# Altium PCB UTM53.pcbdoc
Units mm, origin at the board's own origin, x right, y up, seen from the top; angles counter-clockwise.
Board outline 127.21 x 100.63 mm, 2 copper layers (Top Layer, Bottom Layer), stack 0.07 mm thick; 39 components, 12 nets, 56 pads, 0 vias.
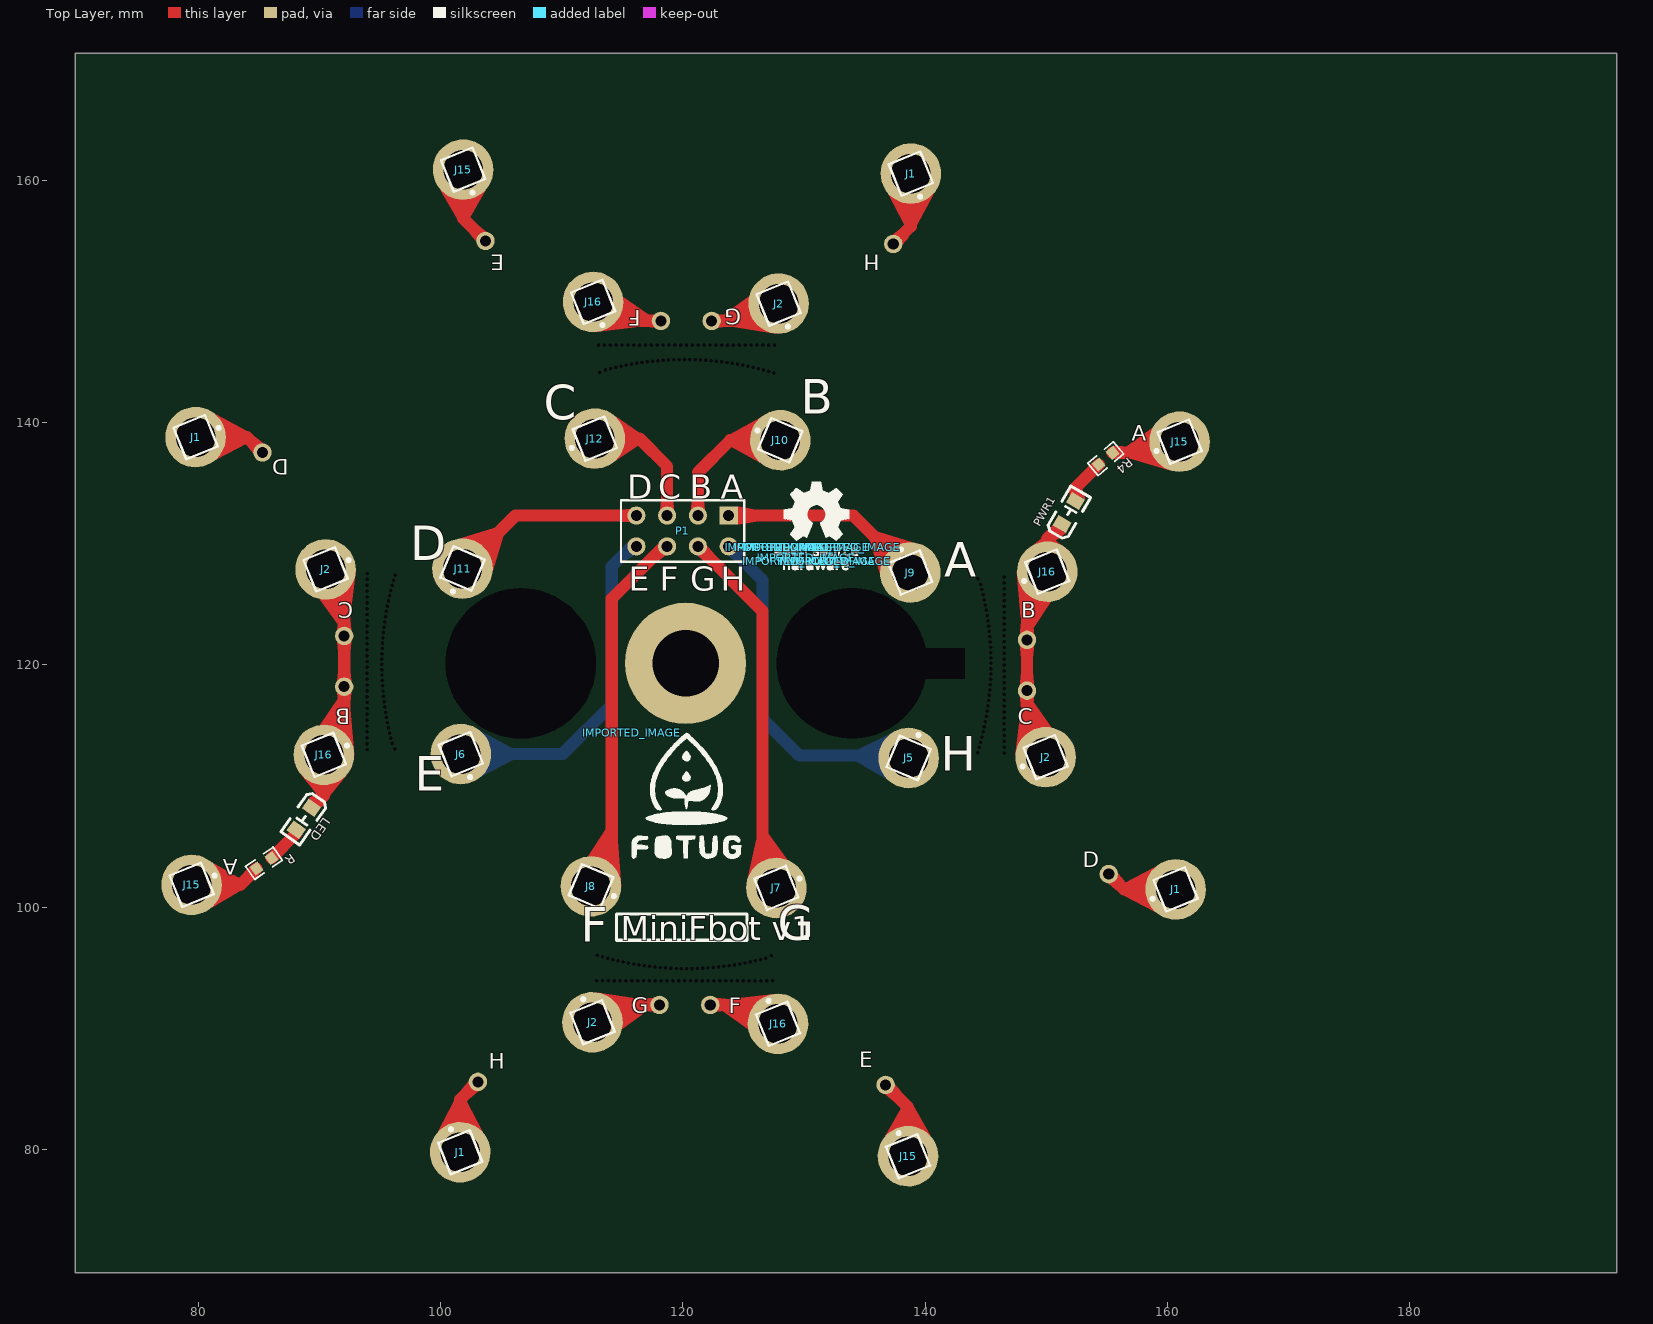
[diagram p0: Top Layer view]
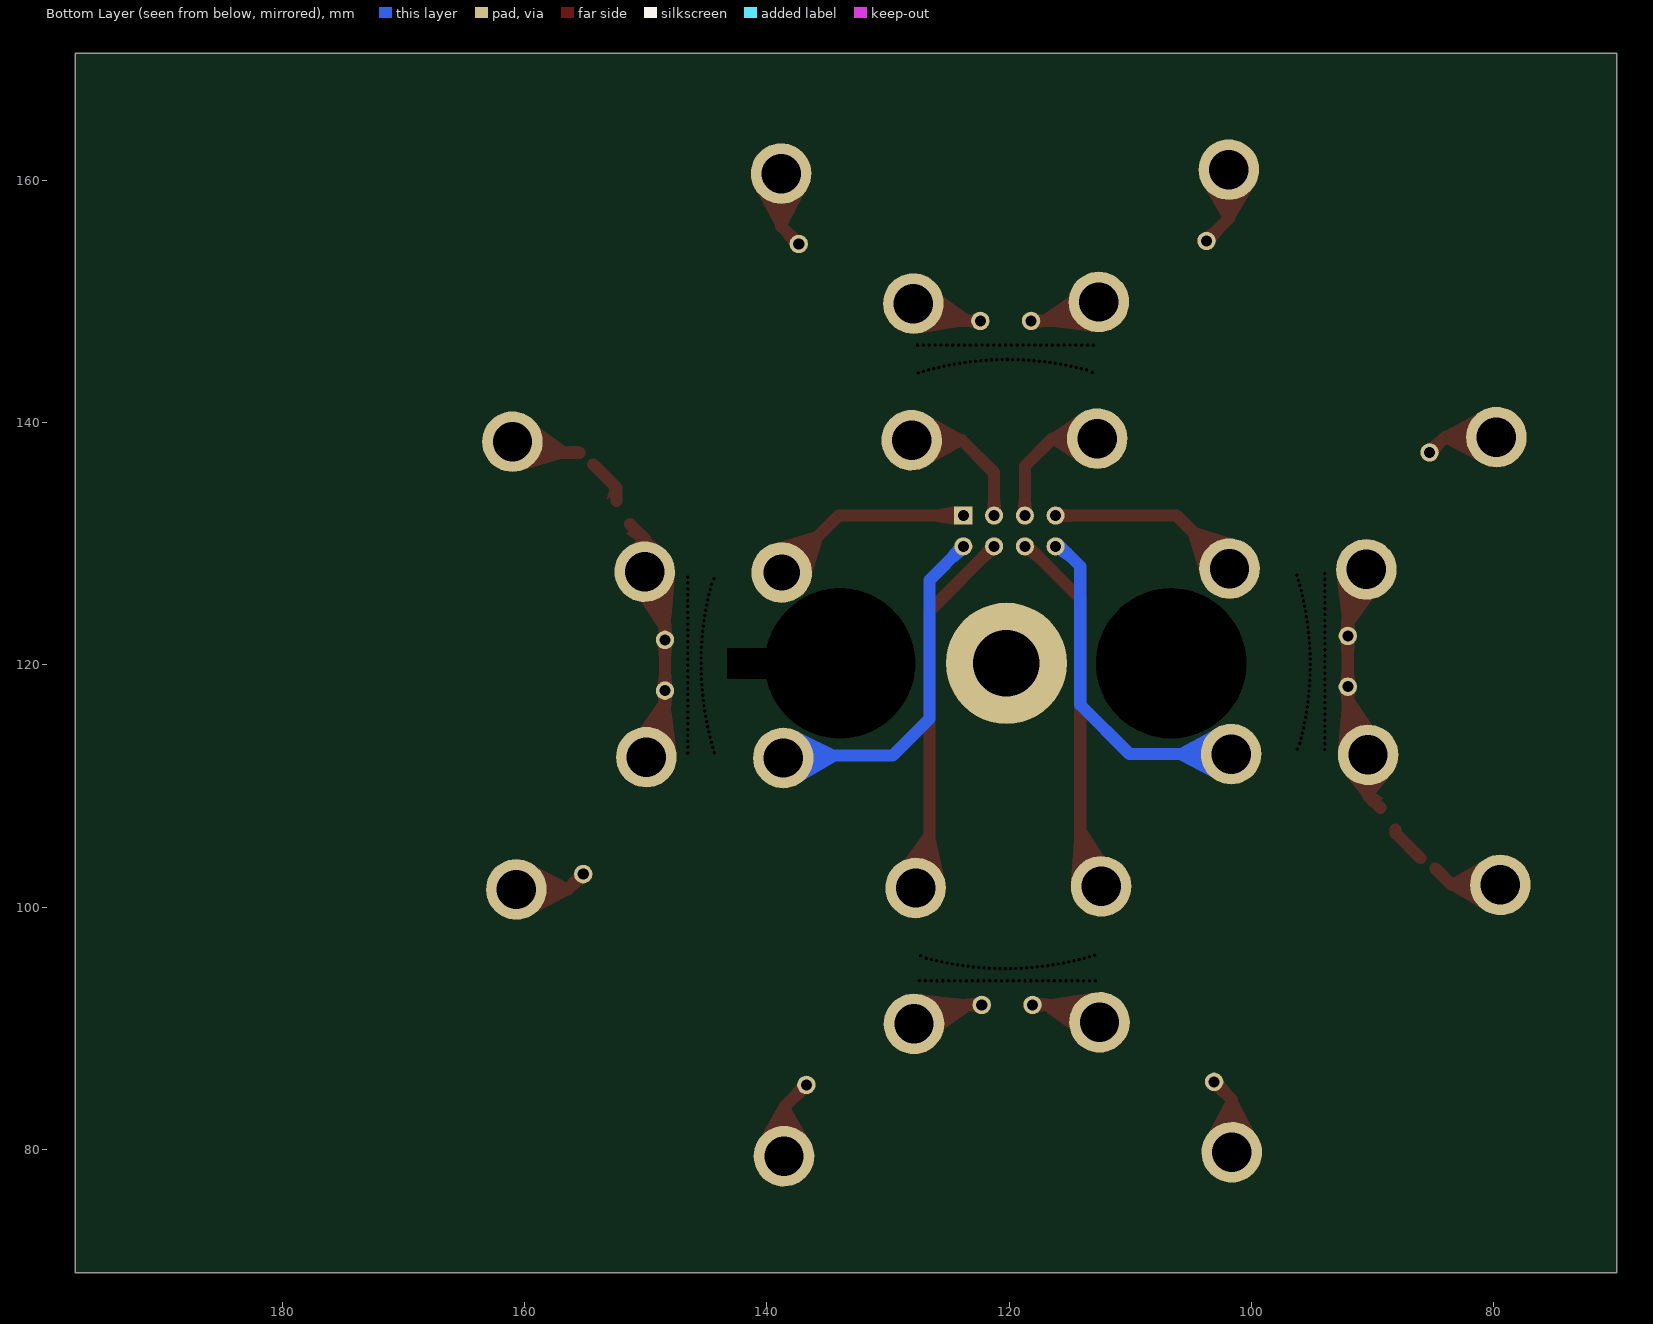
[diagram p1: Bottom Layer view, seen from below]

## Layer stack, top to bottom
Top Layer: signal copper 0.035
Bottom Layer: signal copper 0.035

## Board outline
197.064,69.85 69.85,69.85 69.85,170.478 197.064,170.478
cut-out: 112.82,120.133 ccw(c106.62,120.133) 100.42,120.133 ccw(c106.62,120.133)
cut-out: 146.636,127.245 ccw(c146.509,127.245) 146.382,127.245 ccw(c146.509,127.245)
cut-out: 146.636,126.761 ccw(c146.509,126.761) 146.382,126.761 ccw(c146.509,126.761)
cut-out: 146.636,126.277 ccw(c146.509,126.277) 146.382,126.277 ccw(c146.509,126.277)
cut-out: 146.636,125.793 ccw(c146.509,125.793) 146.382,125.793 ccw(c146.509,125.793)
cut-out: 146.636,124.341 ccw(c146.509,124.341) 146.382,124.341 ccw(c146.509,124.341)
cut-out: 146.636,124.825 ccw(c146.509,124.825) 146.382,124.825 ccw(c146.509,124.825)
cut-out: 146.636,125.309 ccw(c146.509,125.309) 146.382,125.309 ccw(c146.509,125.309)
cut-out: 146.636,123.857 ccw(c146.509,123.857) 146.382,123.857 ccw(c146.509,123.857)
cut-out: 146.636,122.405 ccw(c146.509,122.405) 146.382,122.405 ccw(c146.509,122.405)
cut-out: 146.636,123.373 ccw(c146.509,123.373) 146.382,123.373 ccw(c146.509,123.373)
cut-out: 146.636,122.889 ccw(c146.509,122.889) 146.382,122.889 ccw(c146.509,122.889)
cut-out: 146.636,120.953 ccw(c146.509,120.953) 146.382,120.953 ccw(c146.509,120.953)
cut-out: 146.636,121.437 ccw(c146.509,121.437) 146.382,121.437 ccw(c146.509,121.437)
cut-out: 146.636,121.921 ccw(c146.509,121.921) 146.382,121.921 ccw(c146.509,121.921)
cut-out: 146.636,120.469 ccw(c146.509,120.469) 146.382,120.469 ccw(c146.509,120.469)
cut-out: 146.636,119.017 ccw(c146.509,119.017) 146.382,119.017 ccw(c146.509,119.017)
cut-out: 146.636,119.985 ccw(c146.509,119.985) 146.382,119.985 ccw(c146.509,119.985)
cut-out: 146.636,119.501 ccw(c146.509,119.501) 146.382,119.501 ccw(c146.509,119.501)
cut-out: 146.636,117.565 ccw(c146.509,117.565) 146.382,117.565 ccw(c146.509,117.565)
cut-out: 146.636,118.049 ccw(c146.509,118.049) 146.382,118.049 ccw(c146.509,118.049)
cut-out: 146.636,118.533 ccw(c146.509,118.533) 146.382,118.533 ccw(c146.509,118.533)
cut-out: 146.636,117.081 ccw(c146.509,117.081) 146.382,117.081 ccw(c146.509,117.081)
cut-out: 146.636,115.629 ccw(c146.509,115.629) 146.382,115.629 ccw(c146.509,115.629)
cut-out: 146.636,116.597 ccw(c146.509,116.597) 146.382,116.597 ccw(c146.509,116.597)
cut-out: 146.636,116.113 ccw(c146.509,116.113) 146.382,116.113 ccw(c146.509,116.113)
cut-out: 146.636,114.177 ccw(c146.509,114.177) 146.382,114.177 ccw(c146.509,114.177)
cut-out: 146.636,114.661 ccw(c146.509,114.661) 146.382,114.661 ccw(c146.509,114.661)
cut-out: 146.636,115.145 ccw(c146.509,115.145) 146.382,115.145 ccw(c146.509,115.145)
cut-out: 146.636,113.693 ccw(c146.509,113.693) 146.382,113.693 ccw(c146.509,113.693)
cut-out: 146.636,112.725 ccw(c146.509,112.725) 146.382,112.725 ccw(c146.509,112.725)
cut-out: 146.636,113.209 ccw(c146.509,113.209) 146.382,113.209 ccw(c146.509,113.209)
cut-out: 144.477,127.118 ccw(c144.35,127.118) 144.223,127.118 ccw(c144.35,127.118)
cut-out: 144.446,112.766 ccw(c144.319,112.766) 144.192,112.766 ccw(c144.319,112.766)
cut-out: 144.571,113.187 ccw(c144.444,113.187) 144.317,113.187 ccw(c144.444,113.187)
cut-out: 144.688,113.611 ccw(c144.561,113.611) 144.434,113.611 ccw(c144.561,113.611)
cut-out: 144.798,114.037 ccw(c144.671,114.037) 144.544,114.037 ccw(c144.671,114.037)
cut-out: 144.901,114.465 ccw(c144.774,114.465) 144.647,114.465 ccw(c144.774,114.465)
cut-out: 144.996,114.894 ccw(c144.869,114.894) 144.742,114.894 ccw(c144.869,114.894)
cut-out: 145.084,115.325 ccw(c144.957,115.325) 144.83,115.325 ccw(c144.957,115.325)
cut-out: 145.164,115.757 ccw(c145.037,115.757) 144.91,115.757 ccw(c145.037,115.757)
cut-out: 145.237,116.191 ccw(c145.11,116.191) 144.983,116.191 ccw(c145.11,116.191)
cut-out: 145.302,116.626 ccw(c145.175,116.626) 145.048,116.626 ccw(c145.175,116.626)
cut-out: 145.451,117.937 ccw(c145.324,117.937) 145.197,117.937 ccw(c145.324,117.937)
cut-out: 145.359,117.062 ccw(c145.232,117.062) 145.105,117.062 ccw(c145.232,117.062)
cut-out: 145.409,117.499 ccw(c145.282,117.499) 145.155,117.499 ccw(c145.282,117.499)
cut-out: 145.486,118.376 ccw(c145.359,118.376) 145.232,118.376 ccw(c145.359,118.376)
cut-out: 145.543,120.573 ccw(c145.416,120.573) 145.289,120.573 ccw(c145.416,120.573)
cut-out: 145.532,121.013 ccw(c145.405,121.013) 145.278,121.013 ccw(c145.405,121.013)
cut-out: 145.512,118.815 ccw(c145.385,118.815) 145.258,118.815 ccw(c145.385,118.815)
cut-out: 145.532,119.254 ccw(c145.405,119.254) 145.278,119.254 ccw(c145.405,119.254)
cut-out: 145.543,119.694 ccw(c145.416,119.694) 145.289,119.694 ccw(c145.416,119.694)
cut-out: 145.547,120.133 ccw(c145.42,120.133) 145.293,120.133 ccw(c145.42,120.133)
cut-out: 145.512,121.452 ccw(c145.385,121.452) 145.258,121.452 ccw(c145.385,121.452)
cut-out: 145.486,121.891 ccw(c145.359,121.891) 145.232,121.891 ccw(c145.359,121.891)
cut-out: 145.451,122.33 ccw(c145.324,122.33) 145.197,122.33 ccw(c145.324,122.33)
cut-out: 145.409,122.768 ccw(c145.282,122.768) 145.155,122.768 ccw(c145.282,122.768)
cut-out: 145.359,123.205 ccw(c145.232,123.205) 145.105,123.205 ccw(c145.232,123.205)
cut-out: 145.302,123.641 ccw(c145.175,123.641) 145.048,123.641 ccw(c145.175,123.641)
cut-out: 145.237,124.076 ccw(c145.11,124.076) 144.983,124.076 ccw(c145.11,124.076)
cut-out: 145.164,124.509 ccw(c145.037,124.509) 144.91,124.509 ccw(c145.037,124.509)
cut-out: 145.084,124.942 ccw(c144.957,124.942) 144.83,124.942 ccw(c144.957,124.942)
cut-out: 144.996,125.373 ccw(c144.869,125.373) 144.742,125.373 ccw(c144.869,125.373)
cut-out: 144.901,125.802 ccw(c144.774,125.802) 144.647,125.802 ccw(c144.774,125.802)
cut-out: 144.798,126.23 ccw(c144.671,126.23) 144.544,126.23 ccw(c144.671,126.23)
cut-out: 144.688,126.656 ccw(c144.561,126.656) 144.434,126.656 ccw(c144.561,126.656)
cut-out: 115.017,144.656 ccw(c114.89,144.656) 114.763,144.656 ccw(c114.89,144.656)
cut-out: 114.588,144.561 ccw(c114.461,144.561) 114.334,144.561 ccw(c114.461,144.561)
cut-out: 114.16,144.458 ccw(c114.033,144.458) 113.906,144.458 ccw(c114.033,144.458)
cut-out: 113.734,144.348 ccw(c113.607,144.348) 113.48,144.348 ccw(c113.607,144.348)
cut-out: 115.448,144.743 ccw(c115.321,144.743) 115.194,144.743 ccw(c115.321,144.743)
cut-out: 115.881,144.824 ccw(c115.754,144.824) 115.627,144.824 ccw(c115.754,144.824)
cut-out: 127.203,144.23 ccw(c127.076,144.23) 126.949,144.23 ccw(c127.076,144.23)
cut-out: 126.779,144.348 ccw(c126.652,144.348) 126.525,144.348 ccw(c126.652,144.348)
cut-out: 126.353,144.458 ccw(c126.226,144.458) 126.099,144.458 ccw(c126.226,144.458)
cut-out: 125.925,144.561 ccw(c125.798,144.561) 125.671,144.561 ccw(c125.798,144.561)
cut-out: 125.496,144.656 ccw(c125.369,144.656) 125.242,144.656 ccw(c125.369,144.656)
cut-out: 125.065,144.743 ccw(c124.938,144.743) 124.811,144.743 ccw(c124.938,144.743)
cut-out: 124.633,144.824 ccw(c124.506,144.824) 124.379,144.824 ccw(c124.506,144.824)
cut-out: 124.199,144.896 ccw(c124.072,144.896) 123.945,144.896 ccw(c124.072,144.896)
cut-out: 123.764,144.961 ccw(c123.637,144.961) 123.51,144.961 ccw(c123.637,144.961)
cut-out: 116.75,144.961 ccw(c116.623,144.961) 116.496,144.961 ccw(c116.623,144.961)
cut-out: 116.315,144.896 ccw(c116.188,144.896) 116.061,144.896 ccw(c116.188,144.896)
cut-out: 113.272,144.136 ccw(c113.145,144.136) 113.018,144.136 ccw(c113.145,144.136)
cut-out: 117.186,145.019 ccw(c117.059,145.019) 116.932,145.019 ccw(c117.059,145.019)
cut-out: 118.06,145.111 ccw(c117.933,145.111) 117.806,145.111 ccw(c117.933,145.111)
cut-out: 117.623,145.068 ccw(c117.496,145.068) 117.369,145.068 ccw(c117.496,145.068)
cut-out: 118.938,145.172 ccw(c118.811,145.172) 118.684,145.172 ccw(c118.811,145.172)
cut-out: 118.499,145.145 ccw(c118.372,145.145) 118.245,145.145 ccw(c118.372,145.145)
cut-out: 119.377,145.191 ccw(c119.25,145.191) 119.123,145.191 ccw(c119.25,145.191)
cut-out: 119.817,145.203 ccw(c119.69,145.203) 119.563,145.203 ccw(c119.69,145.203)
cut-out: 122.453,145.111 ccw(c122.326,145.111) 122.199,145.111 ccw(c122.326,145.111)
cut-out: 122.015,145.145 ccw(c121.888,145.145) 121.761,145.145 ccw(c121.888,145.145)
cut-out: 121.576,145.172 ccw(c121.449,145.172) 121.322,145.172 ccw(c121.449,145.172)
cut-out: 121.136,145.191 ccw(c121.009,145.191) 120.882,145.191 ccw(c121.009,145.191)
cut-out: 120.696,145.203 ccw(c120.569,145.203) 120.442,145.203 ccw(c120.569,145.203)
cut-out: 122.891,145.068 ccw(c122.764,145.068) 122.637,145.068 ccw(c122.764,145.068)
cut-out: 123.328,145.019 ccw(c123.201,145.019) 123.074,145.019 ccw(c123.201,145.019)
cut-out: 120.257,145.206 ccw(c120.13,145.206) 120.003,145.206 ccw(c120.13,145.206)
cut-out: 127.624,144.105 ccw(c127.497,144.105) 127.37,144.105 ccw(c127.497,144.105)
cut-out: 95.825,114.804 ccw(c95.698,114.804) 95.571,114.804 ccw(c95.698,114.804)
cut-out: 95.92,114.374 ccw(c95.793,114.374) 95.666,114.374 ccw(c95.793,114.374)
cut-out: 96.022,113.947 ccw(c95.895,113.947) 95.768,113.947 ccw(c95.895,113.947)
cut-out: 96.133,113.521 ccw(c96.006,113.521) 95.879,113.521 ccw(c96.006,113.521)
cut-out: 95.737,115.235 ccw(c95.61,115.235) 95.483,115.235 ccw(c95.61,115.235)
cut-out: 95.657,115.667 ccw(c95.53,115.667) 95.403,115.667 ccw(c95.53,115.667)
cut-out: 96.25,126.989 ccw(c96.123,126.989) 95.996,126.989 ccw(c96.123,126.989)
cut-out: 96.133,126.565 ccw(c96.006,126.565) 95.879,126.565 ccw(c96.006,126.565)
cut-out: 96.022,126.14 ccw(c95.895,126.14) 95.768,126.14 ccw(c95.895,126.14)
cut-out: 95.92,125.712 ccw(c95.793,125.712) 95.666,125.712 ccw(c95.793,125.712)
cut-out: 95.825,125.282 ccw(c95.698,125.282) 95.571,125.282 ccw(c95.698,125.282)
cut-out: 95.737,124.852 ccw(c95.61,124.852) 95.483,124.852 ccw(c95.61,124.852)
cut-out: 95.657,124.419 ccw(c95.53,124.419) 95.403,124.419 ccw(c95.53,124.419)
cut-out: 95.584,123.985 ccw(c95.457,123.985) 95.33,123.985 ccw(c95.457,123.985)
cut-out: 95.519,123.55 ccw(c95.392,123.55) 95.265,123.55 ccw(c95.392,123.55)
cut-out: 95.519,116.536 ccw(c95.392,116.536) 95.265,116.536 ccw(c95.392,116.536)
cut-out: 95.584,116.101 ccw(c95.457,116.101) 95.33,116.101 ccw(c95.457,116.101)
cut-out: 96.344,113.058 ccw(c96.217,113.058) 96.09,113.058 ccw(c96.217,113.058)
cut-out: 95.462,116.972 ccw(c95.335,116.972) 95.208,116.972 ccw(c95.335,116.972)
cut-out: 95.37,117.847 ccw(c95.243,117.847) 95.116,117.847 ccw(c95.243,117.847)
cut-out: 95.412,117.409 ccw(c95.285,117.409) 95.158,117.409 ccw(c95.285,117.409)
cut-out: 95.308,118.724 ccw(c95.181,118.724) 95.054,118.724 ccw(c95.181,118.724)
cut-out: 95.335,118.285 ccw(c95.208,118.285) 95.081,118.285 ccw(c95.208,118.285)
cut-out: 95.289,119.164 ccw(c95.162,119.164) 95.035,119.164 ccw(c95.162,119.164)
cut-out: 95.278,119.603 ccw(c95.151,119.603) 95.024,119.603 ccw(c95.151,119.603)
cut-out: 95.37,122.239 ccw(c95.243,122.239) 95.116,122.239 ccw(c95.243,122.239)
cut-out: 95.335,121.801 ccw(c95.208,121.801) 95.081,121.801 ccw(c95.208,121.801)
cut-out: 95.308,121.362 ccw(c95.181,121.362) 95.054,121.362 ccw(c95.181,121.362)
cut-out: 95.289,120.923 ccw(c95.162,120.923) 95.035,120.923 ccw(c95.162,120.923)
cut-out: 95.278,120.483 ccw(c95.151,120.483) 95.024,120.483 ccw(c95.151,120.483)
cut-out: 95.412,122.677 ccw(c95.285,122.677) 95.158,122.677 ccw(c95.285,122.677)
cut-out: 95.462,123.114 ccw(c95.335,123.114) 95.208,123.114 ccw(c95.335,123.114)
cut-out: 95.274,120.043 ccw(c95.147,120.043) 95.02,120.043 ccw(c95.147,120.043)
cut-out: 96.375,127.411 ccw(c96.248,127.411) 96.121,127.411 ccw(c96.248,127.411)
cut-out: 125.677,95.484 ccw(c125.55,95.484) 125.423,95.484 ccw(c125.55,95.484)
cut-out: 126.106,95.579 ccw(c125.979,95.579) 125.852,95.579 ccw(c125.979,95.579)
cut-out: 126.534,95.682 ccw(c126.407,95.682) 126.28,95.682 ccw(c126.407,95.682)
cut-out: 126.959,95.792 ccw(c126.832,95.792) 126.705,95.792 ccw(c126.832,95.792)
cut-out: 125.246,95.396 ccw(c125.119,95.396) 124.992,95.396 ccw(c125.119,95.396)
cut-out: 124.813,95.316 ccw(c124.686,95.316) 124.559,95.316 ccw(c124.686,95.316)
cut-out: 113.491,95.91 ccw(c113.364,95.91) 113.237,95.91 ccw(c113.364,95.91)
cut-out: 113.915,95.792 ccw(c113.788,95.792) 113.661,95.792 ccw(c113.788,95.792)
cut-out: 114.341,95.682 ccw(c114.214,95.682) 114.087,95.682 ccw(c114.214,95.682)
cut-out: 114.768,95.579 ccw(c114.641,95.579) 114.514,95.579 ccw(c114.641,95.579)
cut-out: 115.198,95.484 ccw(c115.071,95.484) 114.944,95.484 ccw(c115.071,95.484)
cut-out: 115.629,95.396 ccw(c115.502,95.396) 115.375,95.396 ccw(c115.502,95.396)
cut-out: 116.061,95.316 ccw(c115.934,95.316) 115.807,95.316 ccw(c115.934,95.316)
cut-out: 116.495,95.244 ccw(c116.368,95.244) 116.241,95.244 ccw(c116.368,95.244)
cut-out: 116.93,95.179 ccw(c116.803,95.179) 116.676,95.179 ccw(c116.803,95.179)
cut-out: 123.944,95.179 ccw(c123.817,95.179) 123.69,95.179 ccw(c123.817,95.179)
cut-out: 124.379,95.244 ccw(c124.252,95.244) 124.125,95.244 ccw(c124.252,95.244)
cut-out: 127.422,96.003 ccw(c127.295,96.003) 127.168,96.003 ccw(c127.295,96.003)
cut-out: 123.508,95.121 ccw(c123.381,95.121) 123.254,95.121 ccw(c123.381,95.121)
cut-out: 123.071,95.071 ccw(c122.944,95.071) 122.817,95.071 ccw(c122.944,95.071)
cut-out: 121.756,94.968 ccw(c121.629,94.968) 121.502,94.968 ccw(c121.629,94.968)
cut-out: 122.195,94.995 ccw(c122.068,94.995) 121.941,94.995 ccw(c122.068,94.995)
cut-out: 121.317,94.949 ccw(c121.19,94.949) 121.063,94.949 ccw(c121.19,94.949)
cut-out: 120.877,94.937 ccw(c120.75,94.937) 120.623,94.937 ccw(c120.75,94.937)
cut-out: 118.241,95.029 ccw(c118.114,95.029) 117.987,95.029 ccw(c118.114,95.029)
cut-out: 118.679,94.995 ccw(c118.552,94.995) 118.425,94.995 ccw(c118.552,94.995)
cut-out: 119.118,94.968 ccw(c118.991,94.968) 118.864,94.968 ccw(c118.991,94.968)
cut-out: 119.558,94.949 ccw(c119.431,94.949) 119.304,94.949 ccw(c119.431,94.949)
cut-out: 119.997,94.937 ccw(c119.87,94.937) 119.743,94.937 ccw(c119.87,94.937)
cut-out: 117.803,95.071 ccw(c117.676,95.071) 117.549,95.071 ccw(c117.676,95.071)
cut-out: 117.366,95.121 ccw(c117.239,95.121) 117.112,95.121 ccw(c117.239,95.121)
cut-out: 120.437,94.933 ccw(c120.31,94.933) 120.183,94.933 ccw(c120.31,94.933)
cut-out: 113.069,96.035 ccw(c112.942,96.035) 112.815,96.035 ccw(c112.942,96.035)
cut-out: 122.634,95.029 ccw(c122.507,95.029) 122.38,95.029 ccw(c122.507,95.029)
cut-out: 113.972,93.931 ccw(c113.845,93.931) 113.718,93.931 ccw(c113.845,93.931)
cut-out: 113.004,93.931 ccw(c112.877,93.931) 112.75,93.931 ccw(c112.877,93.931)
cut-out: 113.488,93.931 ccw(c113.361,93.931) 113.234,93.931 ccw(c113.361,93.931)
cut-out: 127.04,93.931 ccw(c126.913,93.931) 126.786,93.931 ccw(c126.913,93.931)
cut-out: 126.556,93.931 ccw(c126.429,93.931) 126.302,93.931 ccw(c126.429,93.931)
cut-out: 127.524,93.931 ccw(c127.397,93.931) 127.27,93.931 ccw(c127.397,93.931)
cut-out: 125.104,93.931 ccw(c124.977,93.931) 124.85,93.931 ccw(c124.977,93.931)
cut-out: 126.072,93.931 ccw(c125.945,93.931) 125.818,93.931 ccw(c125.945,93.931)
cut-out: 125.588,93.931 ccw(c125.461,93.931) 125.334,93.931 ccw(c125.461,93.931)
cut-out: 122.684,93.931 ccw(c122.557,93.931) 122.43,93.931 ccw(c122.557,93.931)
cut-out: 124.62,93.931 ccw(c124.493,93.931) 124.366,93.931 ccw(c124.493,93.931)
cut-out: 124.136,93.931 ccw(c124.009,93.931) 123.882,93.931 ccw(c124.009,93.931)
cut-out: 123.652,93.931 ccw(c123.525,93.931) 123.398,93.931 ccw(c123.525,93.931)
cut-out: 123.168,93.931 ccw(c123.041,93.931) 122.914,93.931 ccw(c123.041,93.931)
cut-out: 121.716,93.931 ccw(c121.589,93.931) 121.462,93.931 ccw(c121.589,93.931)
cut-out: 122.2,93.931 ccw(c122.073,93.931) 121.946,93.931 ccw(c122.073,93.931)
cut-out: 114.456,93.931 ccw(c114.329,93.931) 114.202,93.931 ccw(c114.329,93.931)
cut-out: 121.232,93.931 ccw(c121.105,93.931) 120.978,93.931 ccw(c121.105,93.931)
cut-out: 120.748,93.931 ccw(c120.621,93.931) 120.494,93.931 ccw(c120.621,93.931)
cut-out: 119.296,93.931 ccw(c119.169,93.931) 119.042,93.931 ccw(c119.169,93.931)
cut-out: 120.264,93.931 ccw(c120.137,93.931) 120.01,93.931 ccw(c120.137,93.931)
cut-out: 119.78,93.931 ccw(c119.653,93.931) 119.526,93.931 ccw(c119.653,93.931)
cut-out: 117.844,93.931 ccw(c117.717,93.931) 117.59,93.931 ccw(c117.717,93.931)
cut-out: 118.328,93.931 ccw(c118.201,93.931) 118.074,93.931 ccw(c118.201,93.931)
cut-out: 118.812,93.931 ccw(c118.685,93.931) 118.558,93.931 ccw(c118.685,93.931)
cut-out: 117.36,93.931 ccw(c117.233,93.931) 117.106,93.931 ccw(c117.233,93.931)
cut-out: 116.876,93.931 ccw(c116.749,93.931) 116.622,93.931 ccw(c116.749,93.931)
cut-out: 116.392,93.931 ccw(c116.265,93.931) 116.138,93.931 ccw(c116.265,93.931)
cut-out: 115.908,93.931 ccw(c115.781,93.931) 115.654,93.931 ccw(c115.781,93.931)
cut-out: 114.94,93.931 ccw(c114.813,93.931) 114.686,93.931 ccw(c114.813,93.931)
cut-out: 115.424,93.931 ccw(c115.297,93.931) 115.17,93.931 ccw(c115.297,93.931)
cut-out: 113.647,146.397 ccw(c113.52,146.397) 113.393,146.397 ccw(c113.52,146.397)
cut-out: 114.131,146.397 ccw(c114.004,146.397) 113.877,146.397 ccw(c114.004,146.397)
cut-out: 113.163,146.397 ccw(c113.036,146.397) 112.909,146.397 ccw(c113.036,146.397)
cut-out: 115.583,146.397 ccw(c115.456,146.397) 115.329,146.397 ccw(c115.456,146.397)
cut-out: 114.615,146.397 ccw(c114.488,146.397) 114.361,146.397 ccw(c114.488,146.397)
cut-out: 115.099,146.397 ccw(c114.972,146.397) 114.845,146.397 ccw(c114.972,146.397)
cut-out: 118.004,146.397 ccw(c117.877,146.397) 117.75,146.397 ccw(c117.877,146.397)
cut-out: 116.068,146.397 ccw(c115.941,146.397) 115.814,146.397 ccw(c115.941,146.397)
cut-out: 116.552,146.397 ccw(c116.425,146.397) 116.298,146.397 ccw(c116.425,146.397)
cut-out: 117.036,146.397 ccw(c116.909,146.397) 116.782,146.397 ccw(c116.909,146.397)
cut-out: 117.52,146.397 ccw(c117.393,146.397) 117.266,146.397 ccw(c117.393,146.397)
cut-out: 118.972,146.397 ccw(c118.845,146.397) 118.718,146.397 ccw(c118.845,146.397)
cut-out: 118.488,146.397 ccw(c118.361,146.397) 118.234,146.397 ccw(c118.361,146.397)
cut-out: 119.456,146.397 ccw(c119.329,146.397) 119.202,146.397 ccw(c119.329,146.397)
cut-out: 119.94,146.397 ccw(c119.813,146.397) 119.686,146.397 ccw(c119.813,146.397)
cut-out: 121.392,146.397 ccw(c121.265,146.397) 121.138,146.397 ccw(c121.265,146.397)
cut-out: 120.424,146.397 ccw(c120.297,146.397) 120.17,146.397 ccw(c120.297,146.397)
cut-out: 120.908,146.397 ccw(c120.781,146.397) 120.654,146.397 ccw(c120.781,146.397)
cut-out: 126.716,146.397 ccw(c126.589,146.397) 126.462,146.397 ccw(c126.589,146.397)
cut-out: 126.232,146.397 ccw(c126.105,146.397) 125.978,146.397 ccw(c126.105,146.397)
cut-out: 122.844,146.397 ccw(c122.717,146.397) 122.59,146.397 ccw(c122.717,146.397)
cut-out: 122.36,146.397 ccw(c122.233,146.397) 122.106,146.397 ccw(c122.233,146.397)
cut-out: 121.876,146.397 ccw(c121.749,146.397) 121.622,146.397 ccw(c121.749,146.397)
cut-out: 123.328,146.397 ccw(c123.201,146.397) 123.074,146.397 ccw(c123.201,146.397)
cut-out: 123.812,146.397 ccw(c123.685,146.397) 123.558,146.397 ccw(c123.685,146.397)
cut-out: 124.296,146.397 ccw(c124.169,146.397) 124.042,146.397 ccw(c124.169,146.397)
cut-out: 124.78,146.397 ccw(c124.653,146.397) 124.526,146.397 ccw(c124.653,146.397)
cut-out: 125.748,146.397 ccw(c125.621,146.397) 125.494,146.397 ccw(c125.621,146.397)
cut-out: 125.264,146.397 ccw(c125.137,146.397) 125.01,146.397 ccw(c125.137,146.397)
cut-out: 127.684,146.397 ccw(c127.557,146.397) 127.43,146.397 ccw(c127.557,146.397)
cut-out: 127.2,146.397 ccw(c127.073,146.397) 126.946,146.397 ccw(c127.073,146.397)
cut-out: 94.058,126.574 ccw(c93.931,126.574) 93.804,126.574 ccw(c93.931,126.574)
cut-out: 94.058,127.542 ccw(c93.931,127.542) 93.804,127.542 ccw(c93.931,127.542)
cut-out: 94.058,127.058 ccw(c93.931,127.058) 93.804,127.058 ccw(c93.931,127.058)
cut-out: 94.058,113.505 ccw(c93.931,113.505) 93.804,113.505 ccw(c93.931,113.505)
cut-out: 94.058,113.989 ccw(c93.931,113.989) 93.804,113.989 ccw(c93.931,113.989)
cut-out: 94.058,119.314 ccw(c93.931,119.314) 93.804,119.314 ccw(c93.931,119.314)
cut-out: 94.058,119.798 ccw(c93.931,119.798) 93.804,119.798 ccw(c93.931,119.798)
cut-out: 94.058,121.25 ccw(c93.931,121.25) 93.804,121.25 ccw(c93.931,121.25)
cut-out: 94.058,120.282 ccw(c93.931,120.282) 93.804,120.282 ccw(c93.931,120.282)
cut-out: 94.058,120.766 ccw(c93.931,120.766) 93.804,120.766 ccw(c93.931,120.766)
cut-out: 94.058,122.702 ccw(c93.931,122.702) 93.804,122.702 ccw(c93.931,122.702)
cut-out: 94.058,122.218 ccw(c93.931,122.218) 93.804,122.218 ccw(c93.931,122.218)
cut-out: 94.058,121.734 ccw(c93.931,121.734) 93.804,121.734 ccw(c93.931,121.734)
cut-out: 94.058,123.186 ccw(c93.931,123.186) 93.804,123.186 ccw(c93.931,123.186)
cut-out: 94.058,123.67 ccw(c93.931,123.67) 93.804,123.67 ccw(c93.931,123.67)
cut-out: 94.058,124.154 ccw(c93.931,124.154) 93.804,124.154 ccw(c93.931,124.154)
cut-out: 94.058,124.638 ccw(c93.931,124.638) 93.804,124.638 ccw(c93.931,124.638)
cut-out: 94.058,125.606 ccw(c93.931,125.606) 93.804,125.606 ccw(c93.931,125.606)
cut-out: 94.058,125.122 ccw(c93.931,125.122) 93.804,125.122 ccw(c93.931,125.122)
cut-out: 94.058,113.021 ccw(c93.931,113.021) 93.804,113.021 ccw(c93.931,113.021)
cut-out: 94.058,115.441 ccw(c93.931,115.441) 93.804,115.441 ccw(c93.931,115.441)
cut-out: 94.058,114.473 ccw(c93.931,114.473) 93.804,114.473 ccw(c93.931,114.473)
cut-out: 94.058,114.957 ccw(c93.931,114.957) 93.804,114.957 ccw(c93.931,114.957)
cut-out: 94.058,117.862 ccw(c93.931,117.862) 93.804,117.862 ccw(c93.931,117.862)
cut-out: 94.058,115.925 ccw(c93.931,115.925) 93.804,115.925 ccw(c93.931,115.925)
cut-out: 94.058,116.409 ccw(c93.931,116.409) 93.804,116.409 ccw(c93.931,116.409)
cut-out: 94.058,116.893 ccw(c93.931,116.893) 93.804,116.893 ccw(c93.931,116.893)
cut-out: 94.058,117.377 ccw(c93.931,117.377) 93.804,117.377 ccw(c93.931,117.377)
cut-out: 94.058,118.83 ccw(c93.931,118.83) 93.804,118.83 ccw(c93.931,118.83)
cut-out: 94.058,118.346 ccw(c93.931,118.346) 93.804,118.346 ccw(c93.931,118.346)
cut-out: 94.058,126.09 ccw(c93.931,126.09) 93.804,126.09 ccw(c93.931,126.09)
cut-out: 140.015,118.863 cw(c133.947,120.133) 133.947,113.933 cw(c133.947,120.133) 127.747,120.133 cw(c133.947,120.133) 133.947,126.333 cw(c133.947,120.133) 140.024,121.363 143.278,121.363 143.278,118.863

## Components (designator, comment, footprint, x,y, rotation, side; value= is the part's Value field where it differs from the comment)
IMPORTED_IMAGE "IMPORTED_IMAGE" IMPORTED_IMAGE 115.768,114.418 r0 top
IMPORTED_IMAGE "IMPORTED_IMAGE" IMPORTED_IMAGE 128.262,129.709 r0 top
IMPORTED_IMAGE "IMPORTED_IMAGE" IMPORTED_IMAGE 128.941,129.709 r0 top
IMPORTED_IMAGE "IMPORTED_IMAGE" IMPORTED_IMAGE 127.542,129.709 r0 top
IMPORTED_IMAGE "IMPORTED_IMAGE" IMPORTED_IMAGE 130.18,128.846 r0 top
IMPORTED_IMAGE "IMPORTED_IMAGE" IMPORTED_IMAGE 131.338,129.709 r0 top
IMPORTED_IMAGE "IMPORTED_IMAGE" IMPORTED_IMAGE 131.874,128.563 r0 top
IMPORTED_IMAGE "IMPORTED_IMAGE" IMPORTED_IMAGE 133.895,129.709 r0 top
IMPORTED_IMAGE "IMPORTED_IMAGE" IMPORTED_IMAGE 133.11,128.563 r0 top
IMPORTED_IMAGE "IMPORTED_IMAGE" IMPORTED_IMAGE 128.975,128.569 r0 top
J1 "Socket" PIN1#1 160.663,101.469 r112 top
J1 "Socket" PIN1#1 138.813,160.551 r202 top
J1 "Socket" PIN1#1 101.621,79.777 r22 top
J1 "Socket" PIN1#1 79.777,138.797 r292 top
J2 "Socket" PIN1#1 149.934,112.387 r112 top
J2 "Socket" PIN1#1 127.895,149.822 r202 top
J2 "Socket" PIN1#1 112.539,90.506 r22 top
J2 "Socket" PIN1#1 90.506,127.88 r292 top
J5 "Socket" PIN1#1 138.63,112.319 r337 top
J6 "Socket" PIN1#1 101.676,112.641 r202 top
J7 "Socket" PIN1#1 127.712,101.59 r292 top
J8 "Socket" PIN1#1 112.405,101.723 r247 top
J9 "Socket" PIN1#2 138.764,127.626 r22 top
J10 "Socket" PIN1#1 128.035,138.543 r67 top
J11 "Socket" PIN1#1 101.81,127.948 r157 top
J12 "Socket" PIN1#1 112.728,138.677 r112 top
J15 "Socket" PIN1#1 160.985,138.423 r112 top
J15 "Socket" PIN1#1 101.859,160.873 r202 top
J15 "Socket" PIN1#1 138.575,79.454 r22 top
J15 "Socket" PIN1#1 79.454,101.844 r292 top
J16 "Socket" PIN1#1 150.067,127.694 r112 top
J16 "Socket" PIN1#1 112.588,149.955 r202 top
J16 "Socket" PIN1#1 127.846,90.372 r22 top
J16 "Socket" PIN1#1 90.372,112.573 r292 top
LED "LED_BLUE" LED0805-RD 88.724,107.306 r235 top
P1 "Header 4X2" HDR2X4 123.776,132.325 r180 top
PWR1 "LED_BLUE" LED0805-RD 151.843,132.579 r60 top
R "0603WAF1001T5E" R0603 85.422,103.623 r35 top
R4 "0603WAF1001T5E" R0603 154.891,137.024 r220 top

## Footprints (in the part's own frame and the unit in brackets; to place one, negate y for a bottom-side part, rotate by r counter-clockwise, add the part's x,y. Pads: shape width x height; smd on the part's side, far side on the other; paste and mask are expansions set on the pad)
HDR2X4 [mm]
  rect 1.5x1.5 hole 0.9: 1(0,0)
  round 1.5 hole 0.9: 2(0,2.54) 3(2.54,0) 4(2.54,2.54) 5(5.08,0) 6(5.08,2.54) 7(7.62,0) 8(7.62,2.54)
  round 0.013 hole 0.005: 8(7.62,2.54)
  silkscreen extent -1.27,-1.27 8.89,3.81
IMPORTED_IMAGE [mm]
  silkscreen extent 0,-10.41 9.02,0
LED0805-RD [mm]
  rect 1x1.25 smd: 1(-1.1,0) 2(1.1,0)
  silkscreen extent -2.1,-0.95 1.98,0.96
PIN1#1 [mm]
  round 5 hole 3.25: 1(0,0)
  silkscreen extent -1.4,-1.4 1.4,2.17
PIN1#2 [mm]
  round 5 hole 3: 1(0,0)
  silkscreen extent -1.4,-1.4 1.4,2.17
R0603 [mm]
  rect 0.806x0.864 smd: 1(-0.753,0) 2(0.753,0)
  silkscreen extent -1.39,-0.66 1.39,0.66

## Free pads (board coordinates)
  round 1.524 hole 0.914: 2(103.075,85.589) 3(137.359,154.738) 3(155.145,102.734) 4(85.295,137.532) 6(118.061,91.939) 7(122.252,91.939) 7(122.373,148.388) 7(148.396,117.874) 8(92.044,122.393) 8(118.182,148.388) 8(136.73,85.335) 8(148.396,122.065) 9(92.044,118.202) 9(103.704,154.992)
  round 10 hole 5.5: 6(120.22,120.133)

## Nets (pads, with @x,y where several pads share a name; then routed paths per layer and width w, separated by ;. In a path a pad name is that pad's centre, name@x,y a point inside that pad or via, vN(x,y) a via of type N, cw(c..) or ccw(c..) an arc to the next point about the centre after c; other vN are vias at no path point)
$1N1556: J15.1@160.985,138.423 R4.1 | length 5.9
  Top Layer w1: R4.1 160.071,137.509 J15.1@160.985,138.423
$1N1649: PWR1.2 R4.2 | length 3.8
  Top Layer w1: PWR1.2 152.393,134.619 R4.2
$1N1755: LED.2 R.2 | length 3.2
  Top Layer w1: R.2 88.093,106.11 LED.2
A: J9.1 P1.1 | length 16.6
  Top Layer w1: P1.1 134.064,132.325 J9.1@138.548,127.841
B: J10.1 P1.3 | length 11.5
  Top Layer w1: P1.3 121.236,135.881 123.898,138.543 J10.1
C: J12.1 P1.5 | length 11
  Top Layer w1: J12.1 116.408,138.677 118.696,136.389 P1.5
D: J11.1 P1.7 | length 16.2
  Top Layer w1: J11.1 106.187,132.325 P1.7
E: J6.1 P1.8 | length 28.3
  Bottom Layer w1: J6.1 110.06,112.64 114.124,116.704 114.124,128.134 115.775,129.785 P1.8@116.156,129.785
F: J8.1 P1.6 | length 30.8
  Top Layer w1: J8.1 114.124,103.442 114.124,125.467 118.442,129.785 P1.6
G: J7.1 P1.4 | length 30.9
  Top Layer w1: P1.4 126.57,124.451 126.57,103.75 127.712,102.608 J7.1
H: J5.1 P1.2 | length 28.8
  Bottom Layer w1: P1.2 126.57,126.991 126.57,115.561 129.618,112.513 138.435,112.513 J5.1
"": J1.1 J2.1 J15.1@79.454,101.844 J15.1@101.859,160.873 J15.1@138.575,79.454 J16.1 LED.1 pad.2 pad.3 pad.4 pad.6 pad.7 pad.8 pad.9 PWR1.1 R.1 | length 111.3
  Top Layer w1: J15.1@79.454,101.844 83.457,101.844 R.1 ; J1.1@79.777,138.797 84.03,138.797 pad.4 ; LED.1 90.372,109.225 90.372,112.573 92.044,114.244 92.044,118.202 92.044,122.393 92.044,126.342 J2.1@90.506,127.88 ; J1.1@101.621,79.777 101.621,84.136 pad.2 ; J15.1@101.859,160.873 101.859,156.837 pad.9@103.704,154.992 ; J2.1@112.539,90.506 113.972,91.939 pad.6@118.061,91.939 ; J16.1@112.588,149.955 114.155,148.388 pad.8@118.182,148.388 ; pad.7@122.252,91.939 126.279,91.939 J16.1@127.846,90.372 ; pad.7@122.373,148.388 126.461,148.388 J2.1@127.895,149.822 ; pad.8@136.73,85.335 138.575,83.491 J15.1@138.575,79.454 ; pad.3@137.359,154.738 138.813,156.192 J1.1@138.813,160.551 ; J2.1@149.934,112.387 148.396,113.925 148.396,117.874 148.396,122.065 148.396,126.023 150.067,127.694 150.067,130.401 PWR1.1 ; pad.3@155.145,102.734 156.41,101.469 J1.1@160.663,101.469

## Other copper
Top Layer:
  region net G: 128.625,103.917 127.07,106.038 126.07,105.524 125.289,102.204
  region net F: 114.904,101.635 114.624,105.475 113.624,106.422 112.18,104.213
  region net A: 138.92,130.121 136.112,130.984 135.405,130.277 136.269,127.469
  region net B: 126.381,140.418 123.898,139.043 123.898,138.043 126.381,136.668
  region net D: 104.305,127.791 105.169,130.6 104.462,131.307 101.653,130.443
  region net C: 114.381,136.802 116.408,138.177 116.408,139.177 114.381,140.552
  region net A: 126.026,132.825 124.526,133.075 124.526,131.575 126.026,131.825
  region net B: 121.798,132.821 121.736,133.6 120.736,133.6 120.673,132.821
  region net G: 121.189,129.037 121.784,128.53 122.491,129.237 121.984,129.832
  region net C: 119.258,132.821 119.196,133.6 118.196,133.6 118.133,132.821
  region net F: 117.98,130.01 117.405,129.456 117.938,128.574 118.562,129.047
  region net D: 115.66,132.888 114.881,132.825 114.881,131.825 115.66,131.763
  region net "": 159.009,103.344 156.413,101.969 156.413,100.969 159.009,99.594
  region net "": 150.395,114.844 148.896,116.968 147.896,116.188 147.438,112.538
  region net $1N1556: 158.761,139.563 156.582,138.009 156.975,137.009 160.132,136.073
  region net "": 147.568,127.718 147.896,123.931 148.896,123.032 150.357,125.211
  region net "": 151.942,129.348 150.567,130.401 149.567,130.401 148.192,129.348
  region net "": 122.756,91.368 123.547,91.439 123.547,92.439 122.756,92.511
  region net "": 117.557,92.511 116.766,92.439 116.766,91.439 117.557,91.368
  region net "": 136.682,84.575 137.292,84.066 137.999,84.773 137.49,85.383
  region net "": 102.314,85.637 101.805,85.027 102.513,84.32 103.123,84.829
  region net "": 122.877,147.817 123.668,147.888 123.668,148.888 122.877,148.96
  region net "": 103.751,155.753 103.141,156.262 102.434,155.555 102.943,154.945
  region net "": 117.678,148.96 116.886,148.888 116.886,147.888 117.678,147.817
  region net "": 138.119,154.691 138.628,155.301 137.921,156.008 137.311,155.499
  region net "": 147.825,121.561 147.896,120.77 148.896,120.77 148.968,121.561
  region net "": 148.968,122.569 148.896,123.36 147.896,123.36 147.825,122.569
  region net "": 148.968,118.378 148.896,119.169 147.896,119.169 147.825,118.378
  region net "": 147.825,117.37 147.896,116.579 148.896,116.579 148.968,117.37
  region net "": 155.097,101.974 155.707,101.465 156.414,102.172 155.905,102.782
  region net "": 112.701,147.458 116.38,147.888 117.184,148.888 115.052,150.38
  region net "": 127.733,92.87 124.054,92.439 123.25,91.439 125.382,89.948
  region net "": 125.465,150.41 123.36,148.888 124.06,147.888 127.615,147.337
  region net "": 114.969,89.918 117.073,91.439 116.373,92.439 112.819,92.99
  region net "": 136.938,158.897 138.313,156.301 139.313,156.301 140.688,158.897
  region net "": 103.496,81.431 102.121,84.027 101.121,84.027 99.746,81.431
  region net "": 99.984,159.22 101.359,156.837 102.359,156.837 103.734,159.22
  region net "": 140.45,81.108 139.075,83.491 138.075,83.491 136.7,81.108
  region net $1N1649: 152.893,134.619 151.893,134.619 152.102,134.278 153.184,133.653
  region net "": 150.421,130.048 151.584,130.881 150.502,131.506 149.714,130.755
  region net $1N1556: 157.044,137.009 157.075,138.009 155.499,138.099 156.055,137.437
  region net "": 90.045,125.422 91.544,123.299 92.544,124.079 93.001,127.729
  region net "": 81.431,136.922 84.027,138.297 84.027,139.297 81.431,140.672
  region net "": 88.497,110.919 89.872,109.225 90.872,109.225 92.247,110.919
  region net "": 92.872,112.549 92.544,116.336 91.544,117.234 90.083,115.056
  region net "": 92.615,118.706 92.544,119.497 91.544,119.497 91.472,118.706
  region net "": 91.472,117.698 91.544,116.906 92.544,116.906 92.615,117.698
  region net "": 92.615,122.897 92.544,123.688 91.544,123.688 91.472,122.897
  region net "": 91.472,121.889 91.544,121.097 92.544,121.097 92.615,121.889
  region net "": 81.108,99.969 83.457,101.344 83.457,102.344 81.108,103.719
  region net "": 85.343,138.293 84.733,138.802 84.025,138.095 84.534,137.485
  region net "": 90.019,109.578 89.13,108.976 90.154,108.259 90.726,108.871
Bottom Layer:
  region net H: 137.127,114.317 134.421,113.013 134.343,112.013 136.836,110.578
  region net E: 103.329,110.766 105.926,112.14 105.926,113.14 103.331,114.516
  region net H: 123.729,129.037 124.324,128.53 125.031,129.237 124.524,129.832
  region net E: 115.474,130.098 114.855,129.573 115.29,128.594 115.931,129.07

## Silkscreen, mask and mechanical layers (free items; w line width, h text height)
Top Silkscreen Layer:
  drawing of 13 lines, arcs and shapes, not listed
  text "E" at 105.234,153.857 h1.31 r180
  text "H" at 136.222,153.857 h1.31 r180
  text "G" at 124.792,149.412 h1.31 r180
  text "F" at 116.537,149.285 h1.31 r180
  text "B" at 129.734,140.722 h2.83
  text "C" at 108.525,140.214 h2.83
  text "A" at 157.05,138.48 h1.31
  text "D" at 87.454,136.966 h1.31 r180
  text "D" at 115.394,133.722 h2
  text "C" at 117.976,133.722 h2
  text "B" at 120.559,133.722 h2
  text "A" at 123.141,133.722 h2
  text "D" at 97.476,128.657 h2.83
  text "A" at 141.545,127.26 h2.83
  text "E" at 115.531,126.102 h2
  text "F" at 118.067,126.102 h2
  text "G" at 120.604,126.102 h2
  text "H" at 123.141,126.102 h2
  text "C" at 92.788,125.155 h1.31 r180
  text "B" at 147.906,123.875 h1.31
  text "B" at 92.534,116.392 h1.31 r180
  text "C" at 147.652,115.112 h1.31
  text "H" at 141.291,111.258 h2.83
  text "E" at 97.857,109.607 h2.83
  text "A" at 83.263,103.946 h1.31 r180
  text "D" at 152.986,103.301 h1.31
  text "MiniFbot v1" at 114.886,97.273 h2
  text "G" at 127.829,97.288 h2.83
  text "F" at 111.573,97.161 h2.83
  text "G" at 115.775,91.236 h1.31
  text "F" at 123.776,91.236 h1.31
  text "E" at 134.571,86.791 h1.31
  text "H" at 103.964,86.664 h1.31
Mechanical 1:
  drawing of 333 lines, arcs and shapes, not listed